# Altium PCB RFID_PCB.PcbDoc (part 2 of 2)
Units mm, origin at the board's own origin, x right, y up, seen from the top; angles counter-clockwise.
Board outline 160 x 100 mm, 2 copper layers (Top Layer, Bottom Layer); 207 components, 186 nets, 827 pads, 261 vias.
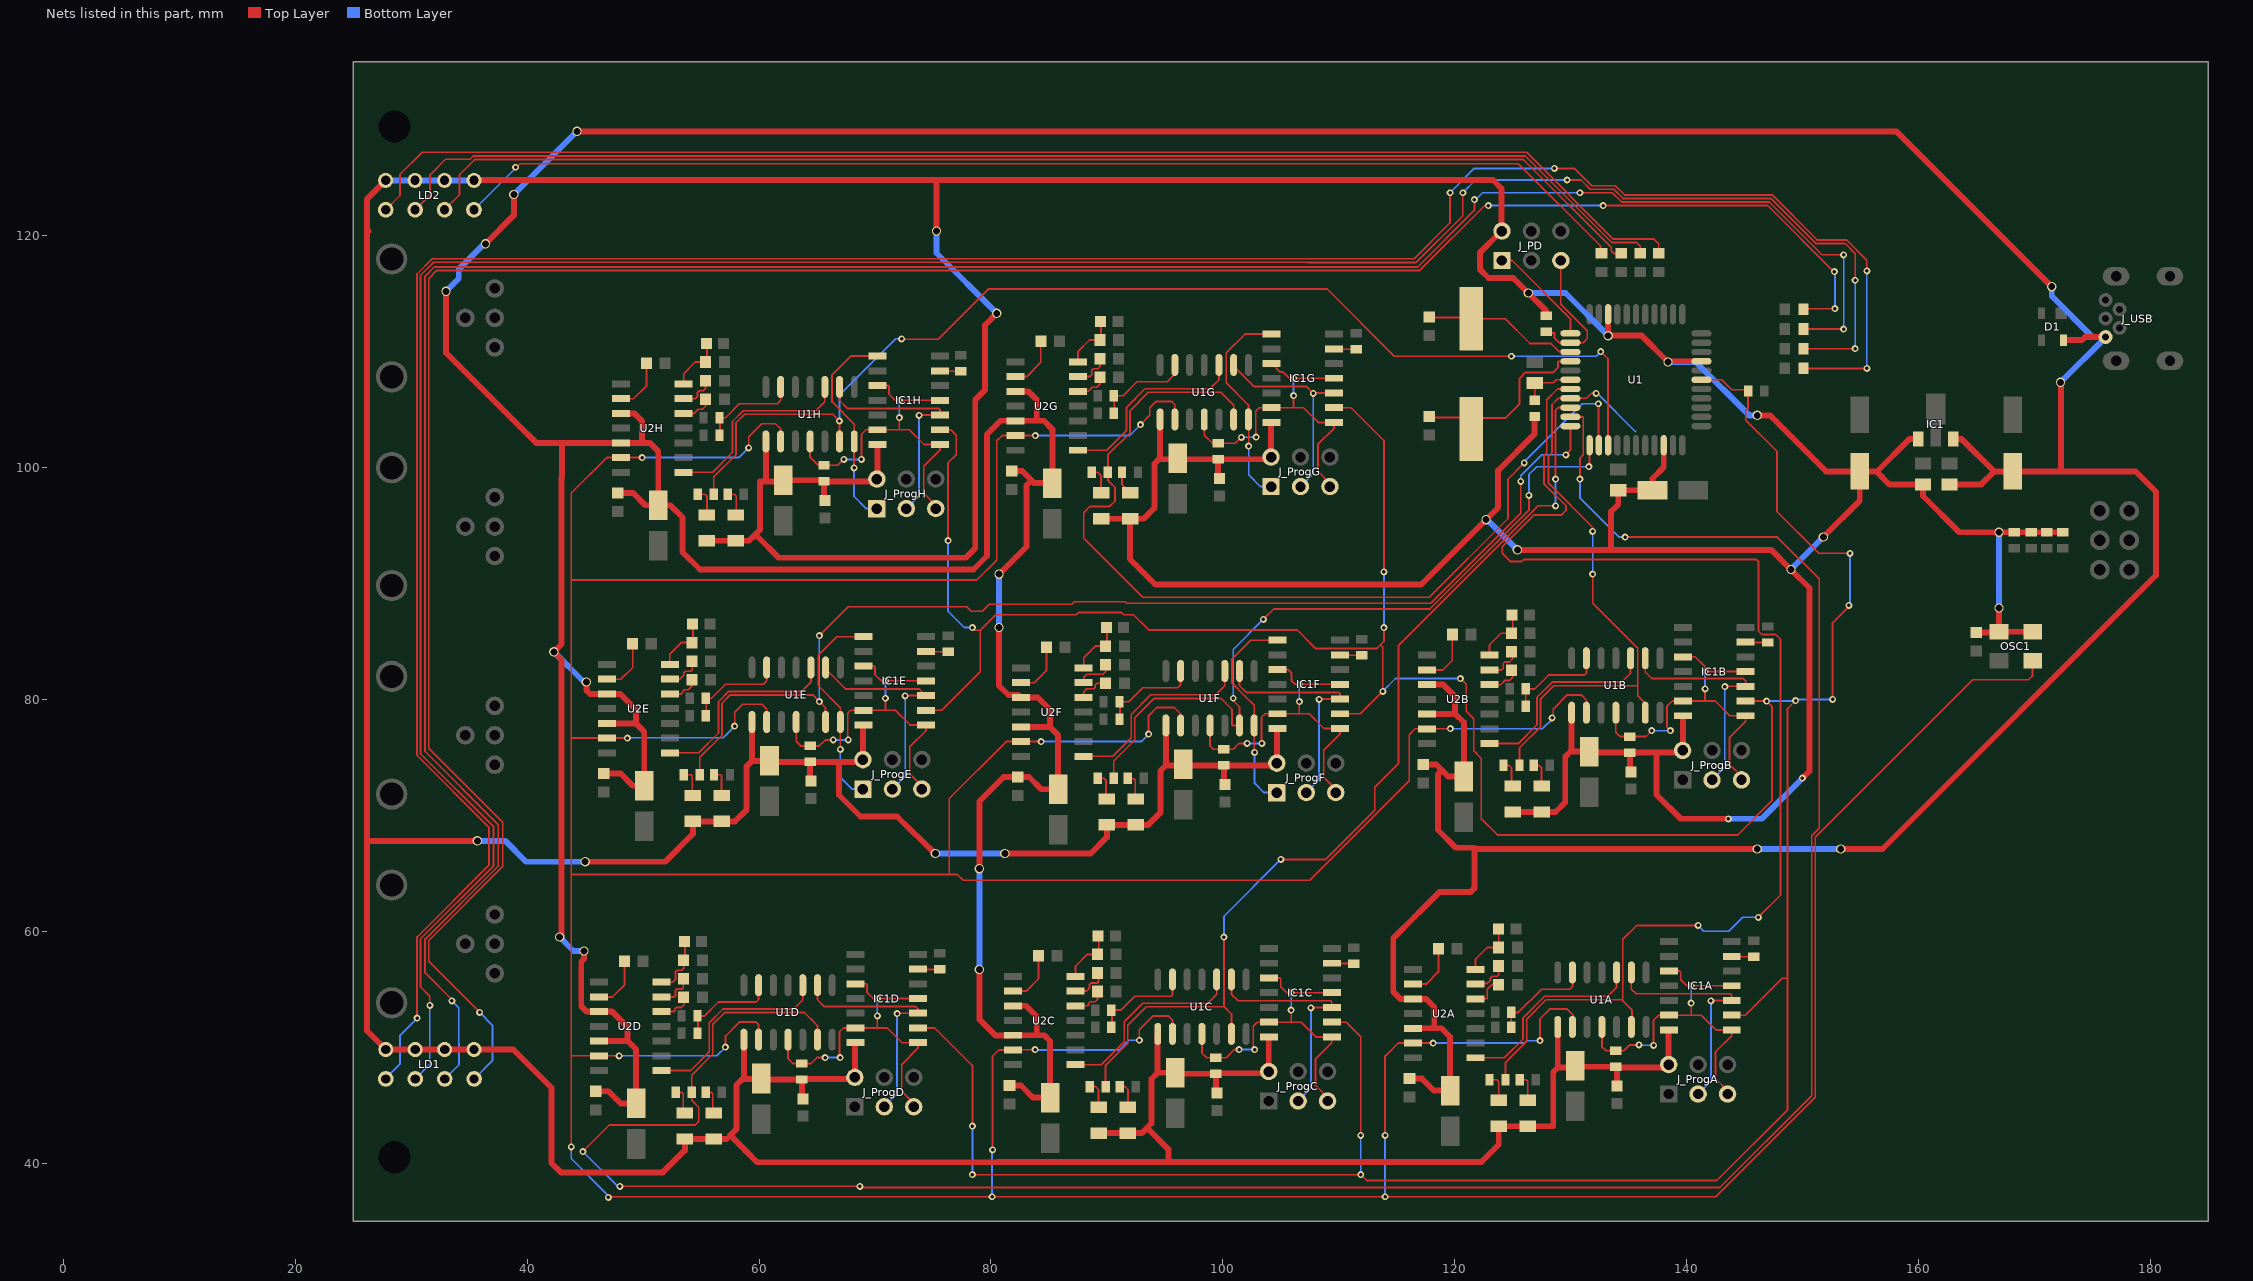
[diagram p2: the nets of this part, all layers, seen from the top]

## Via types
v1: diameter 0.6, hole 0.3, Top Layer to Bottom Layer, 214 vias
v2: diameter 0.8, hole 0.6, Top Layer to Bottom Layer, 45 vias
v3: diameter 0.6, hole 0.6, Top Layer to Bottom Layer, 2 vias

## Nets (pads, with @x,y where several pads share a name; then routed paths per layer and width w, separated by ;. In a path a pad name is that pad's centre, name@x,y a point inside that pad or via, vN(x,y) a via of type N, cw(c..) or ccw(c..) an arc to the next point about the centre after c; other vN are vias at no path point) (continued)
MOSI_S5: IC1E.8 J_ProgE.1 U1E.7 | length 18.4
  Top Layer w0.152: v1@67.1,75.6 v1(67.01,75.69) U1E.7@67.01,78.05 67.01,79.29 65.1,81.2 65.1,83.8 66.71,85.41 IC1E.8@69,85.41
  Bottom Layer w0.152: v1(67.01,75.69) 67.01,73.29 68.04,72.26 J_ProgE.1@68.96,72.26
MOSI_S6: IC1F.8 J_ProgF.1 U1F.7 | length 18.5
  Top Layer w0.152: v1@102.8,75.3 102.8,75.438 102.71,75.528 U1F.7@102.71,77.75 102.71,79.49 101.905,80.295 101.9,80.295 100.8,81.395 100.8,83.5 102.41,85.11 IC1F.8@104.7,85.11
  Bottom Layer w0.152: v1(102.743,75.438) 102.743,72.771 103.554,71.96 J_ProgF.1@104.66,71.96
MOSI_S7: IC1G.8 J_ProgG.1 U1G.7 | length 18.3
  Top Layer w0.152: v1@102.235,101.765 v1@102.3,101.7 ; v1(102.235,101.854) 102.235,104.125 U1G.7@102.21,104.15 102.21,105.39 100.3,107.3 100.3,109.9 101.91,111.51 IC1G.8@104.2,111.51
  Bottom Layer w0.152: v1(102.235,101.854) 102.235,99.365 103.24,98.36 J_ProgG.1@104.16,98.36
MOSI_S8: IC1H.8 J_ProgH.1 U1H.7 | length 18.3
  Top Layer w0.152: v1(68.199,99.965) 68.199,102.239 U1H.7@68.21,102.25 68.21,103.748 66.3,105.658 66.3,108 67.91,109.61 IC1H.8@70.2,109.61
  Bottom Layer w0.152: v1(68.199,99.965) 68.199,97.501 69.24,96.46 J_ProgH.1@70.16,96.46
NetC5_S1_2: C5A.2 U2A.2 | length 4.6
  Top Layer w0.152: U2A.2@116.4,55.44 117.543,55.44 118.6,56.497 C5A.2@118.6,58.5
NetC5_S2_2: C5B.2 U2B.2 | length 4.8
  Top Layer w0.152: U2B.2@117.6,82.54 118.989,82.54 119.8,83.351 C5B.2@119.8,85.6
NetC5_S3_2: C5C.2 U2C.2 | length 4.6
  Top Layer w0.152: U2C.2@81.9,54.84 83.034,54.84 84.1,55.906 C5C.2@84.1,57.9
NetC5_S4_2: C5D.2 U2D.2 | length 4.6
  Top Layer w0.152: U2D.2@46.2,54.34 47.355,54.34 48.4,55.385 C5D.2@48.4,57.4
NetC5_S5_2: C5E.2 U2E.2 | length 4.7
  Top Layer w0.152: U2E.2@46.9,81.74 48.085,81.74 49.1,82.755 C5E.2@49.1,84.8
NetC5_S6_2: C5F.2 U2F.2 | length 4.6
  Top Layer w0.152: U2F.2@82.6,81.44 83.726,81.44 84.8,82.514 C5F.2@84.8,84.5
NetC5_S7_2: C5G.2 U2G.2 | length 4.5
  Top Layer w0.152: U2G.2@82.1,107.84 83.075,107.84 84.3,109.065 C5G.2@84.3,110.9
NetC5_S8_2: C5H.2 U2H.2 | length 4.6
  Top Layer w0.152: U2H.2@48.1,105.94 49.171,105.94 50.3,107.069 C5H.2@50.3,109
NetC6_S1_1: C6A.1 C7A.2 U2A.14 | length 4.9
  Top Layer w0.152: U2A.14@121.8,56.71 121.8,57.6 122.8,58.6 C7A.2@123.8,58.6 C6A.1@123.8,60.2
NetC6_S2_1: C6B.1 C7B.2 U2B.14 | length 4.9
  Top Layer w0.152: U2B.14@123,83.81 123,84.7 124,85.7 125,85.7 C6B.1@125,87.3
NetC6_S3_1: C6C.1 C7C.2 U2C.14 | length 4.9
  Top Layer w0.152: U2C.14@87.3,56.11 87.3,57 88.3,58 C7C.2@89.2,58 89.3,58 C6C.1@89.3,59.6
NetC6_S4_1: C6D.1 C7D.2 U2D.14 | length 5.2
  Top Layer w0.152: U2D.14@51.6,55.61 52.562,55.61 52.796,55.844 52.796,56.495 52.93,56.629 53.327,56.629 53.5,56.802 C7D.2@53.5,57.5 53.6,57.5 C6D.1@53.6,59.1
NetC6_S5_1: C6E.1 C7E.2 U2E.14 | length 4.9
  Top Layer w0.152: U2E.14@52.3,83.01 52.3,83.9 53.3,84.9 C7E.2@54.2,84.9 54.3,84.9 C6E.1@54.3,86.5
NetC6_S6_1: C6F.1 C7F.2 U2F.14 | length 4.9
  Top Layer w0.152: U2F.14@88,82.71 88,83.6 89,84.6 C7F.2@89.9,84.6 90,84.6 C6F.1@90,86.2
NetC6_S7_1: C6G.1 C7G.2 U2G.14 | length 4.9
  Top Layer w0.152: U2G.14@87.5,109.11 87.5,110 88.5,111 89.5,111 C6G.1@89.5,112.6
NetC6_S8_1: C6H.1 C7H.2 U2H.14 | length 4.9
  Top Layer w0.152: U2H.14@53.5,107.21 53.5,108.1 54.5,109.1 55.499,109.1 55.499,110.699 C6H.1@55.5,110.7
NetC7_2: C7.2 L1.1 U1.39 | length 4.8
  Top Layer w0.152: L1.1@126.9,105.729 L1.1@126.9,105.8 C7.2@126.9,107.304 128.513,107.304 128.778,107.569 U1.39@129.986,107.569
NetC8_2: C8.2 Q1.1 U1.37 | length 15.8
  Top Layer w0.152: C8.2@117.8,104.4 117.895,104.305 122.39,104.305 122.428,104.267 124.367,104.267 125.6,105.5 125.6,107.7 126.104,108.204 128.509,108.204 128.905,108.6 128.905,109.093 128.981,109.169 U1.37@129.986,109.169
NetC8_S1_2: C8A.2 U2A.13 | length 3.2
  Top Layer w0.152: U2A.13@121.8,55.44 121.859,55.499 122.809,55.499 123.096,55.786 123.096,55.995 123.23,56.129 123.693,56.129 123.8,56.236 C8A.2@123.8,57
NetC8_S2_2: C8B.2 U2B.13 | length 3.2
  Top Layer w0.152: U2B.13@123,82.54 124.04,82.54 124.196,82.696 124.196,83.095 124.33,83.229 124.729,83.229 125,83.5 C8B.2@125,84.1
NetC8_S3_2: C8C.2 U2C.13 | length 3.3
  Top Layer w0.152: U2C.13@87.3,54.84 88.241,54.84 88.496,55.095 88.496,55.395 88.63,55.529 89.184,55.529 89.281,55.626 89.281,56.381 C8C.2@89.3,56.4
NetC8_S4_2: C8D.2 U2D.13 | length 3.3
  Top Layer w0.152: U2D.13@51.6,54.34 52.689,54.34 52.796,54.447 52.796,54.895 52.93,55.029 53.378,55.029 53.467,55.118 53.467,55.767 C8D.2@53.6,55.9
NetC8_S5_2: C8E.2 U2E.13 | length 3.2
  Top Layer w0.152: U2E.13@52.3,81.74 53.165,81.74 53.496,82.071 53.496,82.295 53.63,82.429 54.108,82.429 54.229,82.55 54.229,83.229 C8E.2@54.3,83.3
NetC8_S6_2: C8F.2 U2F.13 | length 3.2
  Top Layer w0.152: U2F.13@88,81.44 88,81.904 88.265,82.169 89.662,82.169 89.9,82.407 C8F.2@89.9,83
NetC8_S7_2: C8G.2 U2G.13 | length 3.2
  Top Layer w0.152: U2G.13@87.5,107.84 88.536,107.84 88.696,108 88.696,108.395 88.83,108.529 89.225,108.529 89.408,108.712 89.408,109.308 C8G.2@89.5,109.4
NetC8_S8_2: C8H.2 U2H.13 | length 3.2
  Top Layer w0.152: U2H.13@53.5,105.94 54.505,105.94 54.696,106.131 54.696,106.495 54.83,106.629 55.194,106.629 55.372,106.807 55.372,107.372 C8H.2@55.5,107.5
NetC9_2: C9.2 Q1.2 U1.36 | length 13.7
  Top Layer w0.152: C9.2@117.5,112.9 117.541,112.941 122.314,112.941 122.428,112.827 124.373,112.827 126.5,110.7 128.3,110.7 129.018,109.982 129.973,109.982 U1.36@129.986,109.969
NetC9_S1_2: C9A.2 U2A.12 | length 3
  Top Layer w0.152: U2A.12@121.8,54.17 122.752,54.17 122.8,54.218 122.8,55 123.2,55.4 C9A.2@123.8,55.4
NetC9_S2_2: C9B.2 U2B.12 | length 2.9
  Top Layer w0.152: U2B.12@123,81.27 123.952,81.27 124.305,81.624 124.724,81.624 125,81.9 C9B.2@125,82.5
NetC9_S3_2: C9C.2 U2C.12 | length 3
  Top Layer w0.152: U2C.12@87.3,53.57 88.368,53.57 88.421,53.623 88.421,53.79 88.555,53.924 88.976,53.924 89.2,54.148 C9C.2@89.2,54.8 C9C.2@89.3,54.8
NetC9_S4_2: C9D.2 U2D.12 | length 3
  Top Layer w0.152: U2D.12@51.6,53.07 52.689,53.07 52.721,53.102 52.721,53.29 52.855,53.424 53.297,53.424 53.5,53.627 C9D.2@53.5,54.3 C9D.2@53.6,54.3
NetC9_S5_2: C9E.2 U2E.12 | length 2.9
  Top Layer w0.152: U2E.12@52.3,80.47 53.292,80.47 53.421,80.599 53.421,80.69 53.555,80.824 53.9,80.824 54.2,81.124 C9E.2@54.2,81.7 C9E.2@54.3,81.7
NetC9_S6_2: C9F.2 U2F.12 | length 2.9
  Top Layer w0.152: U2F.12@88,80.17 88,80.634 88.277,80.911 88.87,80.911 89.004,81.045 89.004,81.257 89.147,81.4 C9F.2@89.9,81.4 C9F.2@90,81.4
NetC9_S7_2: C9G.2 U2G.12 | length 2.9
  Top Layer w0.152: U2G.12@87.5,106.57 88.409,106.57 88.621,106.782 88.621,106.79 88.755,106.924 89.144,106.924 89.4,107.18 C9G.2@89.4,107.8 C9G.2@89.5,107.8
NetC9_S8_2: C9H.2 U2H.12 | length 2.9
  Top Layer w0.152: U2H.12@53.5,104.67 54.402,104.67 54.755,105.024 55.113,105.024 55.4,105.311 C9H.2@55.4,105.9 C9H.2@55.5,105.9
NetDL1_S1_K: DL1A.K R4A.2 | length 2.5
  Top Layer w0.152: R4A.2@123.01,47.2 123.615,47.2 123.8,47.015 DL1A.K@123.8,45.418
NetDL1_S2_K: DL1B.K R4B.2 | length 2.4
  Top Layer w0.152: R4B.2@124.21,74.3 124.2,74.29 124.71,74.29 124.9,74.1 124.9,72.618 DL1B.K@125,72.518
NetDL1_S3_K: DL1C.K R4C.2 | length 2.4
  Top Layer w0.152: R4C.2@88.51,46.6 89.036,46.6 89.281,46.355 89.281,44.837 DL1C.K@89.3,44.818
NetDL1_S4_K: DL1D.K R4D.2 | length 2.4
  Top Layer w0.152: R4D.2@52.81,46.1 53.341,46.1 53.467,45.974 53.467,44.451 DL1D.K@53.6,44.318
NetDL1_S5_K: DL1E.K R4E.2 | length 2.5
  Top Layer w0.152: R4E.2@53.51,73.5 54.135,73.5 54.229,73.406 54.229,71.789 DL1E.K@54.3,71.718
NetDL1_S6_K: DL1F.K R4F.2 | length 2.4
  Top Layer w0.152: R4F.2@89.21,73.2 89.741,73.2 89.916,73.025 89.916,71.502 DL1F.K@90,71.418
NetDL1_S7_K: DL1G.K R4G.2 | length 2.4
  Top Layer w0.152: R4G.2@88.71,99.6 89.2,99.6 89.5,99.3 DL1G.K@89.5,97.818
NetDL1_S8_K: DL1H.K R4H.2 | length 2.5
  Top Layer w0.152: R4H.2@54.71,97.7 55.335,97.7 55.499,97.536 DL1H.K@55.5,95.918 DL1H.K@55.5,95.918
NetDL2_S1_K: DL2A.K R6A.2 | length 2.4
  Top Layer w0.152: R6A.2@125.61,47.2 126.155,47.2 126.3,47.055 DL2A.K@126.3,45.418
NetDL2_S2_K: DL2B.K R6B.2 | length 2.4
  Top Layer w0.152: R6B.2@126.81,74.3 126.8,74.29 127.31,74.29 127.5,74.1 DL2B.K@127.5,72.518
NetDL2_S3_K: DL2C.K R6C.2 | length 2.4
  Top Layer w0.152: R6C.2@91.11,46.6 91.576,46.6 91.821,46.355 91.821,44.839 DL2C.K@91.8,44.818
NetDL2_S4_K: DL2D.K R6D.2 | length 2.3
  Top Layer w0.152: R6D.2@55.41,46.1 55.881,46.1 56.007,45.974 56.007,44.411 DL2D.K@56.1,44.318
NetDL2_S5_K: DL2E.K R6E.2 | length 2.4
  Top Layer w0.152: R6E.2@56.11,73.5 56.675,73.5 56.769,73.406 56.769,71.749 DL2E.K@56.8,71.718
NetDL2_S6_K: DL2F.K R6F.2 | length 2.3
  Top Layer w0.152: R6F.2@91.81,73.2 91.858,73.152 92.329,73.152 92.456,73.025 92.456,71.462 DL2F.K@92.5,71.418
NetDL2_S7_K: DL2G.K R6G.2 | length 2.1
  Top Layer w0.152: R6G.2@91.31,99.6 91.31,98.508 DL2G.K@92,97.818
NetDL2_S8_K: DL2H.K R6H.2 | length 2.4
  Top Layer w0.152: R6H.2@57.31,97.7 57.875,97.7 58.039,97.536 58.039,95.957 DL2H.K@58,95.918
NetIC1_S1_6: IC1A.6 R1A.2 | length 1.9
  Top Layer w0.152: IC1A.6@143.9,57.84 143.93,57.81 R1A.2@145.8,57.81
NetIC1_S2_6: IC1B.6 R1B.2 | length 1.9
  Top Layer w0.152: IC1B.6@145.1,84.94 145.13,84.91 R1B.2@147,84.91
NetIC1_S3_6: IC1C.6 R1C.2 | length 1.9
  Top Layer w0.152: IC1C.6@109.4,57.24 109.43,57.21 R1C.2@111.3,57.21
NetIC1_S4_6: IC1D.6 R1D.2 | length 1.9
  Top Layer w0.152: IC1D.6@73.7,56.74 73.73,56.71 R1D.2@75.6,56.71
NetIC1_S5_6: IC1E.6 R1E.2 | length 1.9
  Top Layer w0.152: IC1E.6@74.4,84.14 74.43,84.11 R1E.2@76.3,84.11
NetIC1_S6_6: IC1F.6 R1F.2 | length 1.9
  Top Layer w0.152: IC1F.6@110.1,83.84 110.13,83.81 R1F.2@112,83.81
NetIC1_S7_6: IC1G.6 R1G.2 | length 1.9
  Top Layer w0.152: IC1G.6@109.6,110.24 109.63,110.21 R1G.2@111.5,110.21
NetIC1_S8_6: IC1H.6 R1H.2 | length 1.9
  Top Layer w0.152: IC1H.6@75.6,108.34 75.63,108.31 R1H.2@77.5,108.31
NetJ_PD_1: J_PD.1 U1.34 | length 9.3
  Top Layer w0.152: J_PD.1@124.079,117.856 124.968,117.856 129.986,112.838 U1.34@129.986,111.569
NetJ_PD_5: J_PD.5 R9.1 U1.35 | length 12
  Top Layer w0.152: R9.1@127.9,111.71 128.01,111.6 128.6,111.6 128.6,111.2 129.031,110.769 U1.35@129.986,110.769 131.089,110.769 131.445,111.125 131.445,111.81 129.159,114.096 J_PD.5@129.159,117.856
NetLD1_1: LD1.1 R1.1 | length 224.1
  Top Layer w0.152: v1@30.495,52.505 30.495,59.495 36.7,65.7 36.7,68.969 30.495,75.174 30.495,116.695 31.805,118.005 107.395,118.005 107.4,118 116.5,118 119.6,121.1 v1(119.6,123.7) ; v1(128.6,125.8) 130.331,125.8 131.821,124.31 133.853,124.31 134.648,123.514 147.379,123.514 151.257,119.636 153.795,119.636 155.547,117.884 v1(155.547,116.953) ; R1.1@150.089,108.547 v1(155.547,108.547)
  Bottom Layer w0.152: LD1.1@27.8,47.26 27.8,47.332 29.034,48.566 29.034,51.034 v1(30.5,52.5) ; v1(119.6,123.7) 121.7,125.8 v1(128.6,125.8) ; v1(155.547,108.547) v1(155.547,116.953)
NetLD1_3: LD1.3 R2.1 | length 218.9
  Top Layer w0.152: v1(31.6,53.6) 31.6,54.4 30.8,55.2 30.8,59.362 37.1,65.662 37.1,69 30.8,75.3 30.8,116.569 31.931,117.7 107.269,117.7 107.274,117.695 116.626,117.695 116.631,117.7 116.7,117.7 120.7,121.7 v1(120.7,123.7) ; v1(129.7,124.8) 130.9,124.8 131.695,124.005 133.726,124.005 134.521,123.21 147.252,123.21 151.131,119.331 153.669,119.331 154.547,118.453 v1(154.547,116.153) ; R2.1@150.089,110.247 v1(154.547,110.247)
  Bottom Layer w0.152: LD1.3@30.34,47.26 31.6,48.52 v1@31.6,53.454 ; v1(120.7,123.7) 121.8,124.8 v1(129.7,124.8) ; v1(154.547,110.247) v1(154.547,116.153)
NetLD1_5: LD1.5 R3.1 | length 214.3
  Top Layer w0.152: v1(33.5,54) 33.6,54 31.195,56.405 31.195,59.326 37.5,65.631 37.5,69.2 31.195,75.505 31.195,116.495 32.005,117.305 103.595,117.305 103.6,117.3 116.8,117.3 121.7,122.2 v1(121.7,123.1) ; v1(130.8,123.7) 133.6,123.7 134.395,122.905 147.126,122.905 151.684,118.347 v1(153.553,118.347) ; R3.1@150.089,111.947 v1(153.553,111.947)
  Bottom Layer w0.152: LD1.5@32.88,47.26 34.114,48.494 34.114,50.311 34.1,50.325 34.1,53.4 v1(33.5,54) ; v1(121.7,123.1) 121.8,123.1 122.4,123.7 v1(130.8,123.7) ; v1(153.553,111.947) v1(153.553,118.347)
NetLD1_7: LD1.7 R4.1 | length 209.4
  Top Layer w0.152: v1(35.9,53) 31.5,57.4 31.5,59.2 37.9,65.6 37.9,69.4 31.5,75.8 31.5,116.295 32.205,117 103.469,117 103.474,116.995 116.926,116.995 116.931,117 117,117 122.6,122.6 v1(122.9,122.6) ; v1(132.8,122.6) 147,122.6 152.7,116.9 v1(152.75,116.9) ; R4.1@150.089,113.647 150.142,113.7 v1(152.8,113.7)
  Bottom Layer w0.152: LD1.7@35.42,47.26 37,48.84 37,51.9 v1(35.9,53) ; v1(122.9,122.6) v1(132.8,122.6) ; v1(152.75,116.9) 152.8,116.85 v1(152.8,113.7)
NetLD2_1: LD2.1 R5.1 | length 117
  Top Layer w0.152: LD2.1@27.79,122.23 29.024,123.464 29.024,125.29 30.934,127.2 126.2,127.2 133.695,119.705 137.195,119.705 137.6,119.3 R5.1@137.6,118.466
NetLD2_3: LD2.3 R6.1 | length 112.5
  Top Layer w0.152: LD2.3@30.33,122.23 31.623,123.523 31.623,125.268 32.955,126.6 35.064,126.6 35.337,126.873 126.096,126.873 133.569,119.4 135.7,119.4 136,119.1 R6.1@136,118.466
NetLD2_5: LD2.5 R7.1 | length 107.8
  Top Layer w0.152: LD2.5@32.87,122.23 34.163,123.523 34.163,125.268 35.463,126.568 125.932,126.568 133.5,119 133.5,118.7 133.734,118.466 R7.1@134.364,118.466
NetLD2_7: LD2.7 R8.1 | length 102.4
  Top Layer w0.152: v1@38.9,125.72 39.38,126.2 125.5,126.2 132.588,119.112 132.588,118.542 R8.1@132.664,118.466
  Bottom Layer w0.152: LD2.7@35.41,122.23 v1@38.9,125.72
  other v1: 39,125.9
P3V3: C1.2 C1A.1 C1B.1 C1C.1 C1D.1 C1E.1 C1F.1 C1G.1 C1H.1 C2.1 C2A.2 C2B.2 C2C.2 C2D.2 C2E.2 C2F.2 C2G.2 C2H.2 C5.1 C6.1 C12.2 DL1A.A DL1B.A DL1C.A DL1D.A DL1E.A DL1F.A DL1G.A DL1H.A DL2A.A DL2B.A DL2C.A DL2D.A DL2E.A DL2F.A DL2G.A DL2H.A IC1.1 IC1A.14 IC1B.14 IC1C.14 IC1D.14 IC1E.14 IC1F.14 IC1G.14 IC1H.14 J_PD.2 J_ProgA.2 J_ProgB.2 J_ProgC.2 J_ProgD.2 J_ProgE.2 J_ProgF.2 J_ProgG.2 J_ProgH.2 L1.2 LD1.2 LD1.4 LD1.6 LD1.8 LD2.2 LD2.4 LD2.6 LD2.8 OSC1.1 OSC1.4 R5A.2 R5B.2 R5C.2 R5D.2 R5E.2 R5F.2 R5G.2 R5H.2 R9.2 R11.2 R12.2 R13.2 R14.2 U1.9 U1.19 U1.31 U1A.1 U1B.1 U1C.1 U1D.1 U1E.1 U1F.1 U1G.1 U1H.1 | length 846.5
  Top Layer w0.508: 26.298,120.4 26.198,120.5 ; LD2.2@27.79,124.77 26.198,123.178 26.198,120.5 ; LD2.8@35.44,124.8 75.3,124.8 ; v2(35.7,67.8) 26.198,67.8 ; v2(45,66) 51.9,66 54.3,68.4 DL1E.A@54.3,69.482 DL2E.A@56.8,69.482 57.925,69.482 58.928,70.485 58.928,74.228 59.4,74.7 ; DL1H.A@55.5,93.682 DL2H.A@58,93.682 59.138,93.682 59.5,94.044 ; 57.195,42.082 DL2D.A@56.1,42.082 DL1D.A@53.6,42.082 53.6,41.1 51.7,39.2 42.9,39.2 42.1,40 42.1,46.5 38.8,49.8 LD1.8@35.42,49.8 LD1.6@32.88,49.8 LD1.4@30.34,49.8 LD1.2@27.8,49.8 26.198,51.402 26.198,67.8 ; 58.69,47.3 U1D.1@58.69,50.65 ; U1E.1@59.39,78.05 59.39,74.7 59.4,74.7 ; 60.59,98.9 U1H.1@60.59,102.25 ; C2D.2@63.8,45.55 63.7,45.65 R5D.2@63.7,47.21 ; C2E.2@64.5,72.95 64.4,73.05 R5E.2@64.4,74.61 ; R5H.2@65.51,98.9 C1H.1@62.1,98.9 62.01,98.81 60.071,98.81 60.071,94.615 59.5,94.044 ; R5H.2@65.6,98.81 65.6,97.25 C2H.2@65.7,97.15 ; R5H.2@65.604,98.806 69.966,98.806 J_ProgH.2@70.16,99 70.2,99.04 IC1H.14@70.2,101.99 ; IC1D.14@68.3,50.39 68.26,50.35 J_ProgD.2@68.26,47.4 68.104,47.244 63.734,47.244 R5D.2@63.7,47.21 ; J_ProgE.2@68.961,74.803 68.961,77.751 IC1E.14@69,77.79 ; J_ProgE.2@69.1,74.8 68.96,74.8 68.77,74.61 66.9,74.61 ; v2(75.2,66.7) 71.9,69.9 68.746,69.9 66.9,71.746 66.9,74.61 ; v2(75.3,120.4) 75.3,124.8 ; v2(80.5,113.3) 79.5,112.3 79.5,106.7 78.646,105.846 78.646,93.046 77.816,92.216 61.685,92.216 59.857,94.044 59.5,94.044 ; v2@81.25,66.7 84.671,66.7 84.684,66.713 88.613,66.713 90,68.1 DL1F.A@90,69.182 DL2F.A@92.5,69.182 93.566,69.182 94.615,70.231 94.615,73.825 95.09,74.3 ; DL1C.A@89.2,42.482 DL1C.A@89.3,42.582 DL2C.A@91.8,42.582 93.001,42.582 93.427,43.008 ; DL1G.A@89.5,95.582 DL2G.A@92,95.582 ; U1C.1@94.39,51.15 94.361,51.121 94.361,47.8 94.4,47.8 ; 94.59,100.8 U1G.1@94.59,104.15 ; U1F.1@95.09,77.75 95.09,74.3 ; 95.1,74.31 95.09,74.3 ; C1G.1@96.1,100.8 96.189,100.711 94.488,100.711 94.107,100.33 94.107,96.52 93.169,95.582 DL2G.A@92,95.582 ; C1G.1@96.19,100.71 R5G.2@99.6,100.71 ; C2C.2@99.5,46.05 99.4,46.15 R5C.2@99.4,47.71 ; C2G.2@99.7,99.05 99.6,99.15 R5G.2@99.6,100.71 ; C2F.2@100.2,72.65 100.1,72.75 R5F.2@100.1,74.31 ; IC1C.14@104,50.89 103.96,50.85 J_ProgC.2@103.96,47.9 103.812,47.752 99.442,47.752 R5C.2@99.4,47.71 ; IC1G.14@104.2,103.89 104.16,103.85 J_ProgG.2@104.16,100.9 103.971,100.711 R5G.2@99.6,100.71 R5G.2@99.6,100.71 ; IC1F.14@104.7,77.49 104.66,77.45 J_ProgF.2@104.66,74.5 104.455,74.295 100.115,74.295 R5F.2@100.1,74.31 ; J_PD.2@124.079,120.396 J_PD.2@124.041,120.396 ; DL1B.A@125,70.282 DL2B.A@127.5,70.282 128.702,70.282 129.54,71.12 129.54,75.057 129.983,75.5 C1B.1@131.6,75.5 131.69,75.41 R5B.2@135.1,75.41 ; v2(125.4,92.9) 133.5,92.9 ; L1.2@126.9,104.329 126.9,102.9 123.75,99.75 123.75,96.55 117.1,89.9 94.2,89.9 92,92.1 DL2G.A@92,95.582 ; R9.2@127.889,113.09 127.889,113.511 v2(126.35,115.05) 125.056,116.344 122.924,116.344 122.174,117.094 122.174,118.529 J_PD.2@124.041,120.396 ; 128.763,48.118 128.5,47.855 128.5,43.2 128.482,43.182 DL2A.A@126.3,43.182 DL1A.A@123.8,43.182 123.8,41.6 122.3,40.1 95.3,40.1 ; U1A.1@128.89,51.75 128.89,48.26 130.26,48.26 C1A.1@130.4,48.4 130.49,48.31 R5A.2@133.9,48.31 R5A.2@133.95,48.26 ; 130.09,75.585 U1B.1@130.09,78.85 ; U1.31@133.236,113.219 v2@133.236,111.4 ; C2A.2@134,46.65 133.985,46.665 133.985,48.225 R5A.2@133.95,48.26 ; C1.2@134.017,97.938 C1.2@134.112,98.033 ; C2B.2@135.2,73.75 135.128,73.822 135.128,75.382 R5B.2@135.1,75.41 ; U1.9@138.036,101.919 138.036,100.036 137.061,99.061 C2.1@137.061,98.044 134.123,98.044 C1.2@134.112,98.033 ; IC1A.14@138.5,51.49 138.46,51.45 J_ProgA.2@138.46,48.5 138.22,48.26 R5A.2@133.95,48.26 ; J_ProgB.2@139.625,75.565 139.488,75.428 137.4,75.428 ; J_ProgB.2@139.7,75.64 IC1B.14@139.7,78.59 ; U1.19@141.286,109.169 138.469,109.169 v2(138.4,109.1) 136.1,111.4 v2@133.236,111.4 ; v1(143.6,69.7) 139.5,69.7 137.4,71.8 137.4,75.428 ; v2(146.1,104.5) 147.2,104.5 152.042,99.658 C6.1@154.94,99.658 ; v1(150,73.2) 150.6,73.8 150.6,89.602 v2(149.002,91.2) 147.302,92.9 133.5,92.9 ; v2(151.8,94) 154.94,97.14 C6.1@154.94,99.658 ; IC1.1@159.994,102.451 159.22,102.451 156.427,99.658 ; C12.2@164.973,85.763 166.883,85.763 OSC1.1@166.952,85.832 ; v2(166.952,87.882) OSC1.1@166.952,85.832 ; OSC1.4@169.852,85.832 OSC1.1@166.952,85.832 ; R12.2@172.466,94.416 R13.2@171.069,94.416 R11.2@169.714,94.416 R14.2@168.275,94.416 v2(166.95,94.416) 163.521,94.416 160.401,97.536 C5.1@160.401,98.541 157.491,98.541 156.4,99.632 156.427,99.658 ; 26.198,67.8 26.198,120.5 ; 59.4,74.7 C1E.1@60.9,74.7 60.99,74.61 R5E.2@64.4,74.61 ; R5D.2@63.7,47.21 60.29,47.21 C1D.1@60.2,47.3 60.144,47.244 58.547,47.244 58.039,46.736 58.039,42.926 57.506,42.393 58.8,41.1 59.825,40.075 80.577,40.075 80.602,40.1 95.3,40.1 ; R5E.2@64.4,74.61 66.9,74.61 ; 75.3,124.8 123.3,124.8 124.041,124.059 J_PD.2@124.041,120.396 ; 94.4,47.8 93.853,47.253 93.853,43.434 93.459,43.04 95.3,41.2 95.3,40.1 ; 94.4,47.8 C1C.1@95.9,47.8 95.99,47.71 R5C.2@99.4,47.71 ; 95.09,74.3 95.09,74.295 96.495,74.295 C1F.1@96.6,74.4 96.69,74.31 R5F.2@100.1,74.31 ; v2@133.236,111.4 133.202,111.4 v2(133.236,111.366) v2@133.236,111.4 ; 133.5,92.9 133.5,96.2 134.112,96.812 C1.2@134.112,98.033 ; R5B.2@135.1,75.41 135.128,75.438 135.138,75.428 137.4,75.428 ; C6.1@154.94,99.658 156.427,99.658
  Bottom Layer w0.508: LD2.2@27.79,124.77 LD2.4@30.33,124.77 LD2.6@32.87,124.77 LD2.8@35.41,124.77 ; v2@35.75,67.85 35.8,67.8 38.1,67.8 39.9,66 v2(45,66) ; v2(75.2,66.7) v2(81.2,66.7) ; v2(75.3,120.4) 75.3,118.5 v2(80.5,113.3) ; v2(122.7,95.5) 122.8,95.5 v2(125.4,92.9) ; J_PD.2@124.041,120.396 J_PD.2@124.079,120.396 ; v2@126.3,115.05 v2(126.35,115.05) 129.552,115.05 v2(133.236,111.366) ; v2(138.4,109.1) 140.8,109.1 145.4,104.5 v2(146.1,104.5) ; v1(143.6,69.7) 146.5,69.7 v1(150,73.2) ; v2(149.002,91.2) v2(149.002,91.2) v2(151.8,94) ; v2(166.95,94.416) 166.952,94.414 v2(166.952,87.882)
P5V0: C3.1 C3A.2 C3B.2 C3C.2 C3D.2 C3E.2 C3F.2 C3G.2 C3H.2 C4.1 C4A.1 C4B.1 C4C.1 C4D.1 C4E.1 C4F.1 C4G.1 C4H.1 D1.4 IC1.3 J_USB.1 U2A.3 U2A.5 U2B.3 U2B.5 U2C.3 U2C.5 U2D.3 U2D.5 U2E.3 U2E.5 U2F.3 U2F.5 U2G.3 U2G.5 U2H.3 U2H.5 | length 608.6
  Top Layer w0.508: v2(33,115.2) 33,109.9 39.1,103.8 40.77,102.13 43,102.13 ; v2(36.4,119.3) 38.85,121.75 v2(38.85,123.55) ; v2(42.8,59.5) 42.962,59.662 42.962,83.438 v2(42.3,84.1) 42.962,84.762 42.962,99.138 43,99.176 43,102.13 ; v2(44.3,129) 158.1,129 v2(171.5,115.6) ; v2(44.9,58.3) 44.9,57.6 44.663,57.363 44.663,53.537 45.13,53.07 U2D.3@46.2,53.07 47.33,53.07 48.641,51.759 48.641,50.53 ; v2(45.1,81.5) 45.1,80.8 45.43,80.47 U2E.3@46.9,80.47 48.03,80.47 49.37,79.13 49.37,77.93 ; C3D.2@45.9,46.2 47.018,46.2 48.068,45.15 C4D.1@49.4,45.15 49.4,49.8 48.67,50.53 48.641,50.53 ; U2D.5@46.2,50.53 48.641,50.53 ; C3E.2@46.6,73.6 48.066,73.6 49.116,72.55 C4E.1@50.1,72.55 50.1,77.2 49.37,77.93 ; U2E.5@46.9,77.93 49.37,77.93 ; C3H.2@47.8,97.8 49.139,97.8 50.189,96.75 C4H.1@51.3,96.75 ; U2H.3@48.1,104.67 49.23,104.67 49.911,103.989 49.911,102.13 ; v2(79,56.7) 79,52.415 80.415,51 ; 79,65.8 79,71.2 81.1,73.3 C3F.2@82.3,73.3 83.291,73.3 84.341,72.25 C4F.1@85.8,72.25 85.8,76.9 85.07,77.63 ; 80.5,51 81.87,51 U2C.5@81.9,51.03 83.947,51.03 ; v2(80.7,86.2) 80.7,81.187 81.509,80.378 82.392,80.378 U2F.3@82.6,80.17 84.041,80.17 85.09,79.121 85.09,77.63 85.07,77.63 ; v2(80.7,90.8) 83.062,93.162 83.062,98.462 83.5,98.9 ; C3C.2@81.6,46.7 82.586,46.7 83.636,45.65 C4C.1@85.1,45.65 85.1,50.536 84.606,51.03 83.947,51.03 ; C3G.2@81.8,99.7 82.7,99.7 83.5,98.9 ; U2C.3@81.9,53.57 83.03,53.57 83.947,52.653 83.947,51.03 ; U2G.3@82.1,106.57 83.23,106.57 83.947,105.853 83.947,104.03 ; U2F.5@82.6,77.63 85.07,77.63 ; C3A.2@116.1,47.3 117.165,47.3 118.215,46.25 C4A.1@119.6,46.25 119.6,50.9 118.87,51.63 118.237,51.63 ; U2A.5@116.4,51.63 118.237,51.63 ; C3B.2@117.3,74.4 118.386,74.4 118.893,73.893 ; U2B.5@117.6,78.73 120.015,78.73 ; U2B.3@117.6,81.27 119.009,81.27 120.015,80.264 120.015,78.73 ; 121.8,67.1 v2(146.1,67.1) ; v2(153.3,67.1) 156.9,67.1 180.5,90.7 180.5,97.9 178.742,99.658 172.3,99.658 ; C4.1@162.687,98.541 162.698,98.552 165.428,98.552 166.534,99.658 ; IC1.3@162.994,102.451 163.741,102.451 166.534,99.658 ; v2(172.25,107.35) 172.3,107.3 172.3,99.658 ; D1.4@172.527,110.991 174.11,110.991 174.369,111.25 J_USB.1@176.15,111.25 ; 43,102.13 U2H.5@48.1,102.13 49.911,102.13 ; 49.911,102.13 50.57,102.13 51.3,101.4 C4H.1@51.3,96.75 ; C4H.1@51.3,96.75 52.35,96.75 53.4,95.7 53.4,92.7 54.9,91.2 78.5,91.2 79.662,92.362 79.662,102.862 80.83,104.03 U2G.5@82.1,104.03 83.947,104.03 ; 83.5,98.9 83.693,98.707 83.693,98.679 85.271,98.679 C4G.1@85.3,98.65 85.3,103.3 84.57,104.03 83.947,104.03 ; 118.237,51.63 118.237,53.463 117.53,54.17 U2A.3@116.4,54.17 115.315,54.17 114.7,54.785 114.7,59.402 116.536,61.238 116.54,61.238 117.162,61.86 117.162,61.862 118.7,63.4 121.4,63.4 121.7,63.7 121.7,67.2 120.1,67.2 118.562,68.738 118.562,73.562 118.893,73.893 ; 118.893,73.893 119.436,73.35 C4B.1@120.8,73.35 120.8,78 120.07,78.73 120.015,78.73 ; 166.534,99.658 C3.1@168.148,99.658 172.3,99.658
  Bottom Layer w0.508: v2(33,115.2) 34.1,116.3 34.1,117.1 36.3,119.3 v2(36.4,119.3) ; v2(38.85,123.55) v2(44.3,129) ; v2(42.3,84.1) 44.9,81.5 v2(45.1,81.5) ; v2(42.8,59.5) 44,58.3 v2(44.9,58.3) ; v2(79,56.7) v2(79,65.4) ; v2(80.7,86.2) v2(80.7,90.8) ; v2(146.1,67.1) v2(153.3,67.1) ; v2(171.5,115.6) 171.5,114.8 175.05,111.25 J_USB.1@176.15,111.25 v2(172.25,107.35)
R2_DOUT_S1: R2A.2 R3A.1 U1A.13 | length 8.7
  Top Layer w0.152: R2A.2@124.88,51.7 R3A.1@124.88,53 125.5,53 127.5,55 129.93,55 130.16,55.23 U1A.13@130.16,56.45
R2_DOUT_S2: R2B.2 R3B.1 U1B.13 | length 8.6
  Top Layer w0.152: R2B.2@126.14,79.4 R3B.1@126.14,80.9 126.9,80.9 128.1,82.1 131.2,82.1 131.36,82.26 U1B.13@131.36,83.55
R2_DOUT_S3: R2C.2 R3C.1 U1C.13 | length 8.6
  Top Layer w0.152: R2C.2@90.44,51.7 90.44,53.2 91.2,53.2 92.4,54.4 95.548,54.4 95.66,54.512 U1C.13@95.66,55.85
R2_DOUT_S4: R2D.2 R3D.1 U1D.13 | length 8.5
  Top Layer w0.152: R2D.2@54.74,51.2 54.74,52.7 55.3,52.7 56.5,53.9 59.742,53.9 59.96,54.118 U1D.13@59.96,55.35
R2_DOUT_S5: R2E.2 R3E.1 U1E.13 | length 8.5
  Top Layer w0.152: R2E.2@55.44,78.6 55.44,80.1 55.9,80.1 57.1,81.3 60.345,81.3 60.66,81.615 U1E.13@60.66,82.75
R2_DOUT_S6: R2F.2 R3F.1 U1F.13 | length 8.5
  Top Layer w0.152: R2F.2@91.14,78.3 91.14,79.8 91.9,79.8 93.1,81 96.113,81 96.36,81.247 U1F.13@96.36,82.45
R2_DOUT_S7: R2G.2 R3G.1 U1G.13 | length 8.3
  Top Layer w0.152: R2G.2@90.64,104.7 90.64,106.2 91.4,106.2 92.6,107.4 95.2,107.4 95.86,108.06 U1G.13@95.86,108.85
R2_DOUT_S8: R2H.2 R3H.1 U1H.13 | length 8.5
  Top Layer w0.152: R2H.2@56.64,102.8 56.64,104.3 57.1,104.3 58.3,105.5 61.558,105.5 61.86,105.802 U1H.13@61.86,106.95
RESET_S1: IC1A.1 IC1A.4 IC1A.10 IC1A.13 J_ProgA.5 R5A.1 U1A.4 | length 31.5
  Top Layer w0.152: U1A.4@132.7,51.75 132.7,50.053 133.063,49.69 R5A.1@133.9,49.69 134.59,49.69 135.1,50.2 v1(135.9,50.2) ; v1(137.16,50.165) 137.141,50.184 137.141,52.305 137.596,52.76 IC1A.13@138.5,52.76 140.4,52.76 ; IC1A.10@138.5,56.57 139.391,56.57 139.504,56.457 139.504,55.829 140.032,55.3 v1(140.4,55.3) IC1A.4@143.9,55.3 ; v1(140.4,53.8) 140.4,52.76 ; J_ProgA.5@143.54,45.96 143.54,46.26 142.5,47.3 142.5,49.6 143.9,51 IC1A.1@143.9,51.49 142.53,51.49 141.26,52.76 140.4,52.76
  Bottom Layer w0.152: v1@135.935,50.165 v1(137.16,50.165) ; v1(140.4,53.8) v1(140.4,55.3)
RESET_S2: IC1B.1 IC1B.4 IC1B.10 IC1B.13 J_ProgB.5 R5B.1 U1B.4 | length 31.7
  Top Layer w0.152: U1B.4@133.9,78.85 133.9,77.174 134.284,76.79 R5B.1@135.1,76.79 135.11,76.8 136.5,76.8 v1(137,77.3) ; v1(138.6,77.3) 138.303,77.597 138.303,79.403 138.76,79.86 IC1B.13@139.7,79.86 141.6,79.86 ; IC1B.10@139.7,83.67 140.73,83.67 141.6,82.8 v1(141.6,82.4) IC1B.4@145.1,82.4 ; v1(141.6,80.9) 141.6,79.86 ; J_ProgB.5@144.74,73.06 144.74,73.36 143.7,74.4 143.7,76.7 145.1,78.1 IC1B.1@145.1,78.59 143.73,78.59 142.46,79.86 141.6,79.86
  Bottom Layer w0.152: v1(137,77.3) v1(138.6,77.3) ; v1(141.6,80.9) v1(141.6,82.4)
RESET_S3: IC1C.1 IC1C.4 IC1C.10 IC1C.13 J_ProgC.5 R5C.1 U1C.4 | length 31.6
  Top Layer w0.152: U1C.4@98.2,51.15 98.2,49.501 98.611,49.09 R5C.1@99.4,49.09 100.29,49.09 101,49.8 v1(101.4,49.8) ; v1@102.743,49.757 102.616,49.884 102.616,51.816 102.96,52.16 IC1C.13@104,52.16 105.9,52.16 ; IC1C.10@104,55.97 104.939,55.97 105.004,55.905 105.004,55.229 105.532,54.7 v1(105.9,54.7) IC1C.4@109.4,54.7 ; v1(105.9,53.2) 105.9,52.16 ; J_ProgC.5@109.04,45.36 109.04,45.66 108,46.7 108,49 109.4,50.4 IC1C.1@109.4,50.89 108.03,50.89 106.76,52.16 105.9,52.16
  Bottom Layer w0.152: v1(101.4,49.8) v1@102.7,49.8 ; v1(105.9,53.2) v1(105.9,54.7)
  other v1: 102.743,49.784
RESET_S4: IC1D.1 IC1D.4 IC1D.10 IC1D.13 J_ProgD.5 R5D.1 U1D.4 | length 32
  Top Layer w0.152: U1D.4@62.5,50.65 62.5,49.006 62.916,48.59 R5D.1@63.7,48.59 64.49,48.59 65,49.1 v1(65.7,49.1) ; v1(66.997,49.1) 66.941,49.156 66.941,51.32 67.281,51.66 IC1D.13@68.3,51.66 70.2,51.66 ; v1@67.056,49.244 v1@67.2,49.1 ; IC1D.10@68.3,55.47 69.244,55.47 69.304,55.41 69.304,54.729 69.832,54.2 v1(70.2,54.2) IC1D.4@73.7,54.2 ; v1(70.2,52.7) 70.2,51.66 ; J_ProgD.5@73.34,44.86 73.34,45.16 72.3,46.2 72.3,48.5 73.7,49.9 IC1D.1@73.7,50.39 72.33,50.39 71.06,51.66 70.2,51.66
  Bottom Layer w0.152: v1(65.7,49.1) v1(66.997,49.1) v1@67.2,49.1 ; v1(70.2,52.7) v1(70.2,54.2)
RESET_S5: IC1E.1 IC1E.4 IC1E.10 IC1E.13 J_ProgE.5 R5E.1 U1E.4 | length 31.6
  Top Layer w0.152: U1E.4@63.2,78.05 63.2,76.373 63.583,75.99 R5E.1@64.4,75.99 65.195,75.99 65.705,76.5 v1(66.4,76.5) ; v1(67.691,76.5) 67.641,76.55 67.641,78.817 67.884,79.06 IC1E.13@69,79.06 70.9,79.06 ; IC1E.10@69,82.87 69.911,82.87 70.004,82.777 70.004,82.129 70.532,81.6 v1(70.9,81.6) IC1E.4@74.4,81.6 ; v1(70.9,80.1) 70.9,79.06 ; J_ProgE.5@74.04,72.26 74.04,72.56 73,73.6 73,75.9 74.4,77.3 IC1E.1@74.4,77.79 73.03,77.79 71.76,79.06 70.9,79.06
  Bottom Layer w0.152: v1(66.4,76.5) v1(67.691,76.5) ; v1(70.9,80.1) v1(70.9,81.6)
RESET_S6: IC1F.1 IC1F.4 IC1F.10 IC1F.13 J_ProgF.5 R5F.1 U1F.4 | length 31.8
  Top Layer w0.152: U1F.4@98.9,77.75 98.9,75.979 99.189,75.69 R5F.1@100.1,75.69 100.89,75.69 101.4,76.2 v1(102.1,76.2) ; v1(103.378,76.2) 103.341,76.237 103.341,78.449 103.652,78.76 IC1F.13@104.7,78.76 106.6,78.76 ; IC1F.10@104.7,82.57 105.644,82.57 105.918,82.296 105.918,81.614 106.232,81.3 v1(106.6,81.3) IC1F.4@110.1,81.3 ; v1(106.6,79.8) 106.6,78.76 ; J_ProgF.5@109.74,71.96 109.74,72.26 108.7,73.3 108.7,75.6 110.1,77 IC1F.1@110.1,77.49 108.73,77.49 107.46,78.76 106.6,78.76
  Bottom Layer w0.152: v1(102.1,76.2) v1(103.378,76.2) v1@103.5,76.2 ; v1(106.6,79.8) v1(106.6,81.3)
RESET_S7: IC1G.1 IC1G.4 IC1G.10 IC1G.13 J_ProgG.5 R5G.1 U1G.4 | length 31
  Top Layer w0.152: U1G.4@98.4,104.15 98.4,102.8 99.11,102.09 R5G.1@99.6,102.09 101.09,102.09 v1(101.6,102.6) ; v1(102.87,102.616) 102.841,102.645 102.841,104.873 103.128,105.16 IC1G.13@104.2,105.16 106.1,105.16 ; IC1G.10@104.2,108.97 104.941,108.229 105.204,108.229 105.732,107.7 v1(106.1,107.7) IC1G.4@109.6,107.7 ; v1(106.1,106.2) 106.1,105.16 ; J_ProgG.5@109.24,98.36 109.24,98.66 108.2,99.7 108.2,102 109.6,103.4 IC1G.1@109.6,103.89 108.23,103.89 106.96,105.16 106.1,105.16
  Bottom Layer w0.152: v1(101.6,102.6) 101.616,102.616 v1(102.87,102.616) ; v1(106.1,106.2) v1(106.1,107.7)
RESET_S8: IC1H.1 IC1H.4 IC1H.10 IC1H.13 J_ProgH.5 R5H.1 U1H.4 | length 31.3
  Top Layer w0.152: U1H.4@64.4,102.25 64.4,100.9 65.11,100.19 R5H.1@65.6,100.19 65.61,100.2 66.799,100.2 v1(67.31,100.711) ; v1(68.834,100.711) 68.834,102.87 69.224,103.26 IC1H.13@70.2,103.26 72.1,103.26 ; IC1H.10@70.2,107.07 71.111,107.07 71.204,106.977 71.204,106.329 71.732,105.8 v1(72.1,105.8) IC1H.4@75.6,105.8 ; v1(72.1,104.3) 72.1,103.26 ; J_ProgH.5@75.24,96.46 75.24,96.76 74.2,97.8 74.2,100.1 75.6,101.5 IC1H.1@75.6,101.99 74.23,101.99 72.96,103.26 72.1,103.26
  Bottom Layer w0.152: v1@67.31,100.7 v1@68.834,100.7 ; v1(72.1,104.3) v1(72.1,105.8)
SCK: IC1A.2 IC1B.2 IC1C.2 IC1D.2 IC1E.2 IC1F.2 IC1G.2 IC1H.2 R10.2 U1.17 | length 344
  Top Layer w0.152: IC1D.2@73.7,51.66 75.16,51.66 78.4,48.42 v1(78.4,43.2) ; IC1E.2@74.4,79.06 75.76,79.06 79.071,82.371 79.071,85.971 ; IC1H.2@75.6,103.26 76.54,103.26 77,102.8 77,101.1 76.3,100.4 v1(76.3,93.7) ; v1(78.4,39) v1(111.9,39) ; v1(78.4,86.2) 78.629,85.971 79.071,85.971 ; IC1C.2@109.4,52.16 110.64,52.16 111.9,50.9 v1(111.9,42.4) ; IC1G.2@109.6,105.16 111.06,105.16 113.9,102.32 v1(113.9,91) ; IC1F.2@110.1,78.76 111.86,78.76 v1(113.8,80.7) 113.8,84.5 113.6,84.7 ; v1@111.9,38.8 112.1,38.8 112.4,38.5 142.6,38.5 148.714,44.614 148.714,79.214 v1(149.4,79.9) ; v1(113.9,86.2) 113.9,85 113.6,84.7 ; v1(120.5,81.8) 121,81.3 121,78.985 121.638,78.347 121.638,75.562 122.3,74.9 122.3,69.7 123.7,68.3 144.4,68.3 147.36,71.26 147.36,79.4 v1(146.9,79.86) IC1B.2@145.1,79.86 ; U1.17@141.286,107.569 143.031,107.569 143.9,106.7 145.21,106.7 R10.2@145.31,106.6 145.31,105.102 145.116,104.908 145.116,104.092 147.8,101.408 147.8,96.2 151.4,92.6 v1(154.1,92.6) ; IC1A.2@143.9,52.76 145.06,52.76 148.25,55.95 148.65,55.95 ; v1(152.6,80) 152.6,86.6 154,88 v1(154,88.1) ; 79.071,85.971 80.4,87.3 87.369,87.3 87.569,87.5 91.231,87.5 91.431,87.3 92.3,87.3 93.61,85.99 106.395,85.99 107.986,84.4 113.3,84.4 113.6,84.7
  Bottom Layer w0.152: v1(76.3,93.7) 76.3,87.6 77.7,86.2 v1(78.4,86.2) ; v1(78.4,39) v1(78.4,43.2) ; v1(111.9,39) v1(111.9,42.4) ; v1(113.8,80.7) 114.9,81.8 v1(120.5,81.8) ; v1@113.8,86.1 v1(113.9,86.2) 114,86.3 113.9,86.4 v1(113.9,91) ; v1(146.9,79.86) v1@149.36,79.86 ; v1(149.4,79.9) 149.5,80 v1(152.6,80) ; v1(154,88.1) 154.1,88.2 v1(154.1,92.6)
SCK_S1: IC1A.3 J_ProgA.3 U1A.9 | length 21.1
  Top Layer w0.152: U1A.9@135.24,56.45 135.24,55.006 135.646,54.6 143.774,54.6 143.9,54.474 IC1A.3@143.9,54.03 142.13,54.03 v1(142.1,54)
  Bottom Layer w0.152: J_ProgA.3@141,45.96 142.1,47.06 v1(142.1,54)
SCK_S2: IC1B.3 J_ProgB.3 U1B.9 | length 20.9
  Top Layer w0.152: U1B.9@136.44,83.55 136.44,82.36 137,81.8 144.9,81.8 145.1,81.6 IC1B.3@145.1,81.13 143.33,81.13 v1(143.3,81.1)
  Bottom Layer w0.152: J_ProgB.3@142.2,73.06 143.3,74.16 v1(143.3,81.1)
SCK_S3: IC1C.3 J_ProgC.3 U1C.9 | length 21
  Top Layer w0.152: U1C.9@100.74,55.85 100.74,54.581 101.321,54 109.322,54 109.4,53.922 IC1C.3@109.4,53.43 107.63,53.43 v1(107.6,53.4)
  Bottom Layer w0.152: J_ProgC.3@106.5,45.36 107.6,46.46 v1(107.6,53.4)
SCK_S4: IC1D.3 J_ProgD.3 U1D.9 | length 20.9
  Top Layer w0.152: U1D.9@65.04,55.35 65.04,54.086 65.626,53.5 73.5,53.5 73.7,53.3 IC1D.3@73.7,52.93 71.93,52.93 v1(71.9,52.9)
  Bottom Layer w0.152: J_ProgD.3@70.8,44.86 71.9,45.96 v1(71.9,52.9)
SCK_S5: IC1E.3 J_ProgE.3 U1E.9 | length 20
  Top Layer w0.152: U1E.9@65.74,82.75 65.74,82.622 67.462,80.9 73.83,80.9 IC1E.3@74.4,80.33 72.63,80.33 v1(72.6,80.3)
  Bottom Layer w0.152: J_ProgE.3@71.5,72.26 72.6,73.36 v1(72.6,80.3)
SCK_S6: IC1F.3 J_ProgF.3 U1F.9 | length 21
  Top Layer w0.152: U1F.9@101.44,82.45 101.44,81.186 102.026,80.6 110.027,80.6 110.1,80.527 IC1F.3@110.1,80.03 108.33,80.03 v1(108.3,80)
  Bottom Layer w0.152: J_ProgF.3@107.2,71.96 108.3,73.06 v1(108.3,80)
SCK_S7: IC1G.3 J_ProgG.3 U1G.9 | length 20
  Top Layer w0.152: U1G.9@100.94,108.85 100.94,108.722 102.662,107 107.2,107 107.77,106.43 IC1G.3@109.6,106.43 107.83,106.43 v1(107.8,106.4)
  Bottom Layer w0.152: J_ProgG.3@106.7,98.36 107.8,99.46 v1(107.8,106.4)
SCK_S8: IC1H.3 J_ProgH.3 U1H.9 | length 20.9
  Top Layer w0.152: U1H.9@66.94,106.95 66.94,105.78 67.62,105.1 75.494,105.1 75.6,104.994 IC1H.3@75.6,104.53 73.83,104.53 v1(73.8,104.5)
  Bottom Layer w0.152: J_ProgH.3@72.7,96.46 73.8,97.56 v1(73.8,104.5)
SCLK_S1: U1A.10 U2A.8 | length 17
  Top Layer w0.152: U2A.8@121.8,49.09 124.29,49.09 125.905,50.705 125.905,52.543 127.753,54.39 133.19,54.39 133.97,55.17 U1A.10@133.97,56.45
SCLK_S2: U1B.10 U2B.8 | length 17.4
  Top Layer w0.152: U2B.8@123,76.19 125.49,76.19 127.105,77.805 127.105,80.174 128.421,81.49 134.39,81.49 135.17,82.27 U1B.10@135.17,83.55
SCLK_S3: U1C.10 U2C.8 | length 17
  Top Layer w0.152: U2C.8@87.3,48.49 89.521,48.49 91.505,50.474 91.505,52.205 93.09,53.79 98.69,53.79 99.47,54.57 U1C.10@99.47,55.85
SCLK_S4: U1D.10 U2D.8 | length 17.4
  Top Layer w0.152: U2D.8@51.6,47.99 54.09,47.99 55.705,49.605 55.705,52.105 56.89,53.29 62.99,53.29 63.77,54.07 U1D.10@63.77,55.35
SCLK_S5: U1E.10 U2E.8 | length 17.6
  Top Layer w0.152: U2E.8@52.3,75.39 54.79,75.39 56.5,77.1 56.5,79.8 57.39,80.69 63.69,80.69 64.47,81.47 U1E.10@64.47,82.75
SCLK_S6: U1F.10 U2F.8 | length 17.1
  Top Layer w0.152: U2F.8@88,75.09 90.49,75.09 92.095,76.695 92.095,78.695 93.79,80.39 99.39,80.39 100.17,81.17 U1F.10@100.17,82.45
SCLK_S7: U1G.10 U2G.8 | length 17.1
  Top Layer w0.152: U2G.8@87.5,101.49 89.99,101.49 91.7,103.2 91.7,105.2 93.29,106.79 98.89,106.79 99.67,107.57 U1G.10@99.67,108.85
SCLK_S8: U1H.10 U2H.8 | length 17.5
  Top Layer w0.152: U2H.8@53.5,99.59 55.99,99.59 57.705,101.305 57.705,103.974 58.621,104.89 64.89,104.89 65.67,105.67 U1H.10@65.67,106.95
SS_BUS1: R4A.1 U1.40 U1A.6 | length 111.5
  Top Layer w0.152: R4A.1@124.39,47.2 124.39,48.69 126.21,50.51 126.21,52.416 127.879,54.086 134.414,54.086 ; U1.40@129.986,106.769 128.869,106.769 127.934,105.834 127.934,101.265 127.7,101.031 127.7,98.6 129.6,96.7 129.6,96.3 129.2,95.9 126.831,95.9 124.1,93.169 124.1,92.6 124.8,91.9 125.792,91.9 125.954,92.062 146.038,92.062 146.2,91.9 146.2,85.9 146.5,85.6 147.7,85.6 148.105,85.195 148.105,63.105 v1(146.2,61.2) ; U1A.6@135.24,51.75 135.3,51.81 135.3,53.2 134.414,54.086 ; v1(141,60.5) 135.7,60.5 134.495,59.295 134.495,57.407 134.499,57.403 134.499,54.17 134.414,54.086
  Bottom Layer w0.152: v1(141,60.5) 141.5,60 143.652,60 144.852,61.2 v1(146.2,61.2)
SS_BUS2: R4B.1 U1.41 U1B.6 | length 54.4
  Top Layer w0.152: R4B.1@125.59,74.3 125.59,75.821 127.41,77.641 127.41,80.047 128.548,81.186 135.714,81.186 ; v1(131.9,90.8) 131.9,88.3 135.8,84.4 135.8,80.3 136.44,79.66 U1B.6@136.44,78.85 ; v1(131.9,94.5) 131.9,94.831 128.1,98.631 128.1,101 128.395,101.295 128.395,105.433 128.931,105.969 U1.41@129.986,105.969 131.369,105.969 131.8,106.4 v1(132.2,106.4)
  Bottom Layer w0.152: v1(131.9,90.8) v1(131.9,94.5) ; v1(132.2,106.4) 132.3,106.4 135.6,103.1
SS_BUS3: R4C.1 U1.42 U1C.6 | length 85.5
  Top Layer w0.152: R4C.1@89.89,46.6 89.89,48.428 91.81,50.348 91.81,51.91 93.386,53.486 100.114,53.486 ; v1(100.1,59.5) 100.114,59.486 100.114,53.486 ; U1C.6@100.74,51.15 100.74,52.86 100.114,53.486 ; v1(105,66.2) 108.869,66.2 113.1,70.431 113.1,72.436 115.164,74.5 115.164,84.664 127.2,96.7 v1(128.7,96.7) ; v1(128.7,99) 128.7,104.931 128.938,105.169 U1.42@129.986,105.169
  Bottom Layer w0.152: v1(100.1,59.5) 100.1,61.3 v1(105,66.2) ; v1@128.65,96.75 128.7,96.8 v1(128.7,99)
SS_BUS4: R4D.1 U1.43 U1D.6 | length 218.7
  Top Layer w0.152: v1(44.8,41) 47.1,43.3 48.349,43.3 48.358,43.291 54.491,43.291 54.8,43.6 54.8,44.8 54.19,45.41 R4D.1@54.19,46.1 54.19,47.59 56.01,49.41 56.01,51.979 57.017,52.986 63.914,52.986 64.477,52.423 ; v1(48,38) v1(68.7,38) 68.805,37.895 111.942,37.895 111.947,37.89 142.852,37.89 142.857,37.895 142.874,37.895 150.795,45.816 150.795,68.226 151.438,68.869 151.438,90.4 147.838,94 v1(134.7,94) ; 64.5,52.4 65.04,51.86 U1D.6@65.04,50.65 ; U1.43@129.986,104.369 131.1,104.369 131.1,101.1 130.81,100.81 130.8,100.821 v1(130.8,99)
  Bottom Layer w0.152: v1(44.8,41) 47.8,38 v1(48,38) ; v1(130.8,99) 130.8,97.4 134.2,94 v1(134.7,94)
SS_BUS5: R4E.1 U1.44 U1E.6 | length 99.4
  Top Layer w0.152: R4E.1@54.89,73.5 54.89,75.006 56.805,76.921 56.805,79.674 57.517,80.386 64.614,80.386 65.74,79.26 U1E.6@65.74,78.05 ; v1(65.2,85.5) 67.7,88 77.9,88 78.295,87.605 79.252,87.605 79.862,88.214 86.99,88.214 87.19,88.414 91.61,88.414 91.724,88.3 117.938,88.3 125.7,96.062 v1(125.7,98.8) ; v1(129.6,101.1) 129.986,101.486 U1.44@129.986,103.569
  Bottom Layer w0.152: v1(65.2,79.8) v1(65.2,85.5) ; v1(125.7,98.8) 125.7,99.3 127.5,101.1 v1(129.6,101.1)
SS_BUS6: R4F.1 U1.1 U1F.6 | length 65.1
  Top Layer w0.152: R4F.1@90.59,73.2 90.59,74.69 92.4,76.5 92.4,78.4 94.086,80.086 99.845,80.086 100.8,79.131 100.8,77.8 100.85,77.75 U1F.6@101.44,77.75 101.44,79.36 100.9,79.9 v1(100.9,80.1) ; v1(103.5,86.9) 104.395,87.795 117.864,87.795 126.4,96.331 v1(126.4,97.6) ; v1(131.572,100.076) 131.636,100.14 U1.1@131.636,101.919
  Bottom Layer w0.152: v1(100.9,80.1) 100.9,84.3 v1(103.5,86.9) ; v1(126.4,97.6) 126.4,99.4 127.076,100.076 v1(131.572,100.076)
SS_BUS7: R4G.1 U1.2 U1G.6 | length 84.5
  Top Layer w0.152: U1G.6@100.94,104.15 100.94,105.36 99.814,106.486 93.586,106.486 92.005,104.905 92.005,103.005 90.09,101.09 R4G.1@90.09,99.6 90.09,98.91 90.306,98.694 90.7,98.3 90.7,97.1 90.249,96.649 88.547,96.649 88,96.102 88,93.9 93.09,88.81 117.81,88.81 124.6,95.6 124.6,99 v1(126,100.4) ; v1(132.4,105.5) 132.4,101.955 U1.2@132.436,101.919
  Bottom Layer w0.152: v1(126,100.4) 126,100.5 131,105.5 v1(132.4,105.5)
SS_BUS8: R4H.1 U1.3 U1H.6 | length 100.8
  Top Layer w0.152: R4H.1@56.09,97.7 56.09,99.19 58.01,101.11 58.01,103.847 58.748,104.586 66.356,104.586 v1(66.929,104.013) 66.94,104.002 U1H.6@66.94,102.25 ; v1@72.334,111.066 75.466,111.066 79.81,115.41 108.99,115.41 114.8,109.6 v1(124.9,109.6) ; v1(132.6,110) 133.236,109.364 U1.3@133.236,101.919
  Bottom Layer w0.152: v1(66.929,104.013) 66.929,106.229 71.8,111.1 v1(72.3,111.1) ; v1(124.9,109.6) 132.218,109.6 v1@132.6,109.982
XTAL1_S1: OSC1.3 U1A.2 U1B.2 U1C.2 U1D.2 U1E.2 U1F.2 U1G.2 U1H.2 U2A.6 U2B.6 U2C.6 U2D.6 U2E.6 U2F.6 U2G.6 U2H.6 | length 539.4
  Top Layer w0.152: v1(43.8,41.4) 43.8,64.9 ; 43.825,49.26 U2D.6@46.2,49.26 v1(47.932,49.26) ; v1(47,37.05) 47.05,37.1 v1(80.1,37.1) v1(114,37.1) 142.51,37.1 151.1,45.69 151.1,68.1 164.7,81.7 169.5,81.7 169.852,82.052 OSC1.3@169.852,83.332 ; v1(48.632,76.66) U2E.6@46.9,76.66 43.84,76.66 43.8,76.7 ; v1(49.911,100.86) U2H.6@48.1,100.86 46.86,100.86 43.8,97.8 43.8,90.3 ; v1(57.1,50) 57.1,50.96 58.324,52.184 59.716,52.184 59.96,51.94 U1D.2@59.96,50.65 ; v1(57.9,77.7) 57.9,78.9 58.584,79.584 60.216,79.584 60.66,79.14 U1E.2@60.66,78.05 ; v1(59.1,101.7) 59.1,102.66 60.224,103.784 61.416,103.784 61.86,103.34 U1H.2@61.86,102.25 ; v1(80.137,41.137) 80.137,49.228 80.669,49.76 U2C.6@81.9,49.76 81.924,49.784 v1(83.82,49.784) ; v1(83.832,102.76) U2G.6@82.1,102.76 80.96,102.76 80.5,102.3 80.5,92.015 78.785,90.3 43.8,90.3 ; v1(84.332,76.36) U2F.6@82.6,76.36 81.313,76.36 76.4,71.447 76.4,64.9 ; v1(92.8,50.6) 92.8,51.5 94,52.7 95.3,52.7 95.66,52.34 U1C.2@95.66,51.15 U1C.2@95.7,51.19 ; v1(92.9,103.7) 93.706,104.506 93.706,105.166 94.224,105.684 95.616,105.684 95.86,105.44 U1G.2@95.86,104.15 ; v1(93.6,77) 93.6,78.6 94.3,79.3 95.8,79.3 96.36,78.74 U1F.2@96.36,77.75 U1F.2@96.4,77.79 ; v1(114,42.4) 114,49.23 115.13,50.36 U2A.6@116.4,50.36 v1(118.132,50.36) ; v1@119.634,77.46 U2B.6@117.6,77.46 116.576,77.46 116.078,76.962 116.078,72.978 107.505,64.405 77.595,64.405 77.1,64.9 76.4,64.9 ; v1(127.36,50.56) 127.36,52.46 128.184,53.284 129.716,53.284 130.2,52.8 130.2,51.79 U1A.2@130.16,51.75 ; v1(128.4,78.4) 128.5,78.4 128.5,79.16 129.724,80.384 130.916,80.384 131.4,79.9 U1B.2@131.4,79.4 ; U1B.2@131.36,78.6 U1B.2@131.36,78.85 ; 43.8,64.9 76.4,64.9 ; 43.8,64.9 43.8,76.7 ; 43.8,76.7 43.8,90.3
  Bottom Layer w0.152: v1(43.8,41.4) 43.8,40.4 47,37.2 v1(47,37.05) ; v1(47.932,49.26) 56.36,49.26 v1(57.1,50) ; v1(48.632,76.66) 48.672,76.7 56.9,76.7 v1(57.9,77.7) ; v1(49.911,100.86) 58.26,100.86 v1(59.1,101.7) ; v1@80,37 v1(80.1,37.1) v1@80.1,41.1 ; v1@83.82,49.76 91.06,49.76 91.9,50.6 v1(92.8,50.6) ; v1(83.832,102.76) 91.96,102.76 v1(92.9,103.7) ; v1(84.332,76.36) 92.96,76.36 v1(93.6,77) ; v1(114,37.1) v1(114,42.4) ; v1(118.132,50.36) 126,50.36 126.2,50.56 v1(127.36,50.56) ; v1@119.84,77.46 127.56,77.46 128.4,78.3 v1(128.4,78.4)
  other v1: 119.634,77.47
pads on no net: IC1A.11 IC1B.11 IC1C.11 IC1D.11 IC1E.11 IC1F.11 IC1G.11 IC1H.11 J1.6 J1.7 J2.6 J2.7 J3.6 J3.7 J4.6 J4.7 J_PD.3 J_PD.4 U1.4 U1.5 U1.6 U1.7 U1.14 U1.24 U1.25 U1A.3 U1A.11 U1B.3 U1B.11 U1C.3 U1C.11 U1D.3 U1D.11 U1E.3 U1E.11 U1F.3 U1F.11 U1G.3 U1G.11 U1H.3 U1H.11 U2A.7 U2A.11 U2B.7 U2B.11 U2C.7 U2C.11 U2D.7 U2D.11 U2E.7 U2E.11 U2F.7 U2F.11 U2G.7 U2G.11 U2H.7 U2H.11

## Silkscreen, mask and mechanical layers (free items; w line width, h text height)
Top Overlay:
  text "S7" at 96.9,112.2 h1.52
  text "S8" at 63,111.9 h1.52
  text "S2" at 132.5,89.1 h1.52
  text "S6" at 97.6,88.2 h1.52
  text "S5" at 61.9,86.9 h1.52
  text "S1" at 131.3,60.7 h1.52
  text "S3" at 96.7,60.1 h1.52
  text "S4" at 61,59.5 h1.52

## Text inside footprints (layer, text, board x,y; h text height)
J_PD: Top Overlay "1" at 122.047,117.348 h0.7; Top Overlay "2" at 121.539,119.888 h0.7; Top Overlay "5" at 130.683,117.348 h0.7; Top Overlay "6" at 130.683,119.888 h0.7
J_ProgA: Top Overlay "1" at 136.428,45.452 h0.7; Top Overlay "2" at 136.26,48 h0.7; Top Overlay "5" at 145.064,45.452 h0.7; Top Overlay "6" at 145.064,47.992 h0.7
J_ProgB: Top Overlay "1" at 137.628,72.552 h0.7; Top Overlay "2" at 137.46,75.1 h0.7; Top Overlay "5" at 146.264,72.552 h0.7; Top Overlay "6" at 146.264,75.092 h0.7
J_ProgC: Top Overlay "1" at 101.928,44.852 h0.7; Top Overlay "2" at 101.76,47.4 h0.7; Top Overlay "5" at 110.564,44.852 h0.7; Top Overlay "6" at 110.564,47.392 h0.7
J_ProgD: Top Overlay "1" at 66.228,44.352 h0.7; Top Overlay "2" at 66.06,46.9 h0.7; Top Overlay "5" at 74.864,44.352 h0.7; Top Overlay "6" at 74.864,46.892 h0.7
J_ProgE: Top Overlay "1" at 66.929,71.755 h0.7; Top Overlay "2" at 66.761,74.303 h0.7; Top Overlay "5" at 75.565,71.755 h0.7; Top Overlay "6" at 75.565,74.295 h0.7
J_ProgF: Top Overlay "1" at 102.628,71.452 h0.7; Top Overlay "2" at 102.46,74 h0.7; Top Overlay "5" at 111.264,71.452 h0.7; Top Overlay "6" at 111.264,73.992 h0.7
J_ProgG: Top Overlay "1" at 102.128,97.852 h0.7; Top Overlay "2" at 101.96,100.4 h0.7; Top Overlay "5" at 110.764,97.852 h0.7; Top Overlay "6" at 110.764,100.392 h0.7
J_ProgH: Top Overlay "1" at 68.128,95.952 h0.7; Top Overlay "2" at 67.96,98.5 h0.7; Top Overlay "5" at 76.764,95.952 h0.7; Top Overlay "6" at 76.764,98.492 h0.7
LD1: Top Overlay "C" at 36.69,46.879 h1; Top Overlay "A" at 36.69,49.419 h1; Top Overlay "A" at 27.019,48.199 h1 r90; Top Overlay "B" at 29.559,48.199 h1 r90; Top Overlay "C" at 32.099,48.199 h1 r90; Top Overlay "D" at 34.639,48.199 h1 r90; Mechanical 14 "A" at 36.69,49.419 h1; Mechanical 14 "C" at 36.69,46.879 h1; Mechanical 14 "A" at 27.019,48.199 h1 r90; Mechanical 14 "B" at 29.559,48.199 h1 r90; Mechanical 14 "C" at 32.099,48.199 h1 r90; Mechanical 14 "D" at 34.639,48.199 h1 r90
LD2: Top Overlay "C" at 36.68,121.849 h1; Top Overlay "A" at 36.68,124.389 h1; Top Overlay "A" at 27.009,123.169 h1 r90; Top Overlay "B" at 29.549,123.169 h1 r90; Top Overlay "C" at 32.089,123.169 h1 r90; Top Overlay "D" at 34.629,123.169 h1 r90; Mechanical 14 "A" at 36.68,124.389 h1; Mechanical 14 "C" at 36.68,121.849 h1; Mechanical 14 "A" at 27.009,123.169 h1 r90; Mechanical 14 "B" at 29.549,123.169 h1 r90; Mechanical 14 "C" at 32.089,123.169 h1 r90; Mechanical 14 "D" at 34.629,123.169 h1 r90